# Altium PCB RobotCtrl_V2_Core-board.PcbDoc
Units mil, origin at the board's own origin, x right, y up, seen from the top; angles counter-clockwise.
Board outline 1880 x 1545 mil, 2 copper layers (Top Layer, Bottom Layer); 48 components, 127 nets, 368 pads, 173 vias.
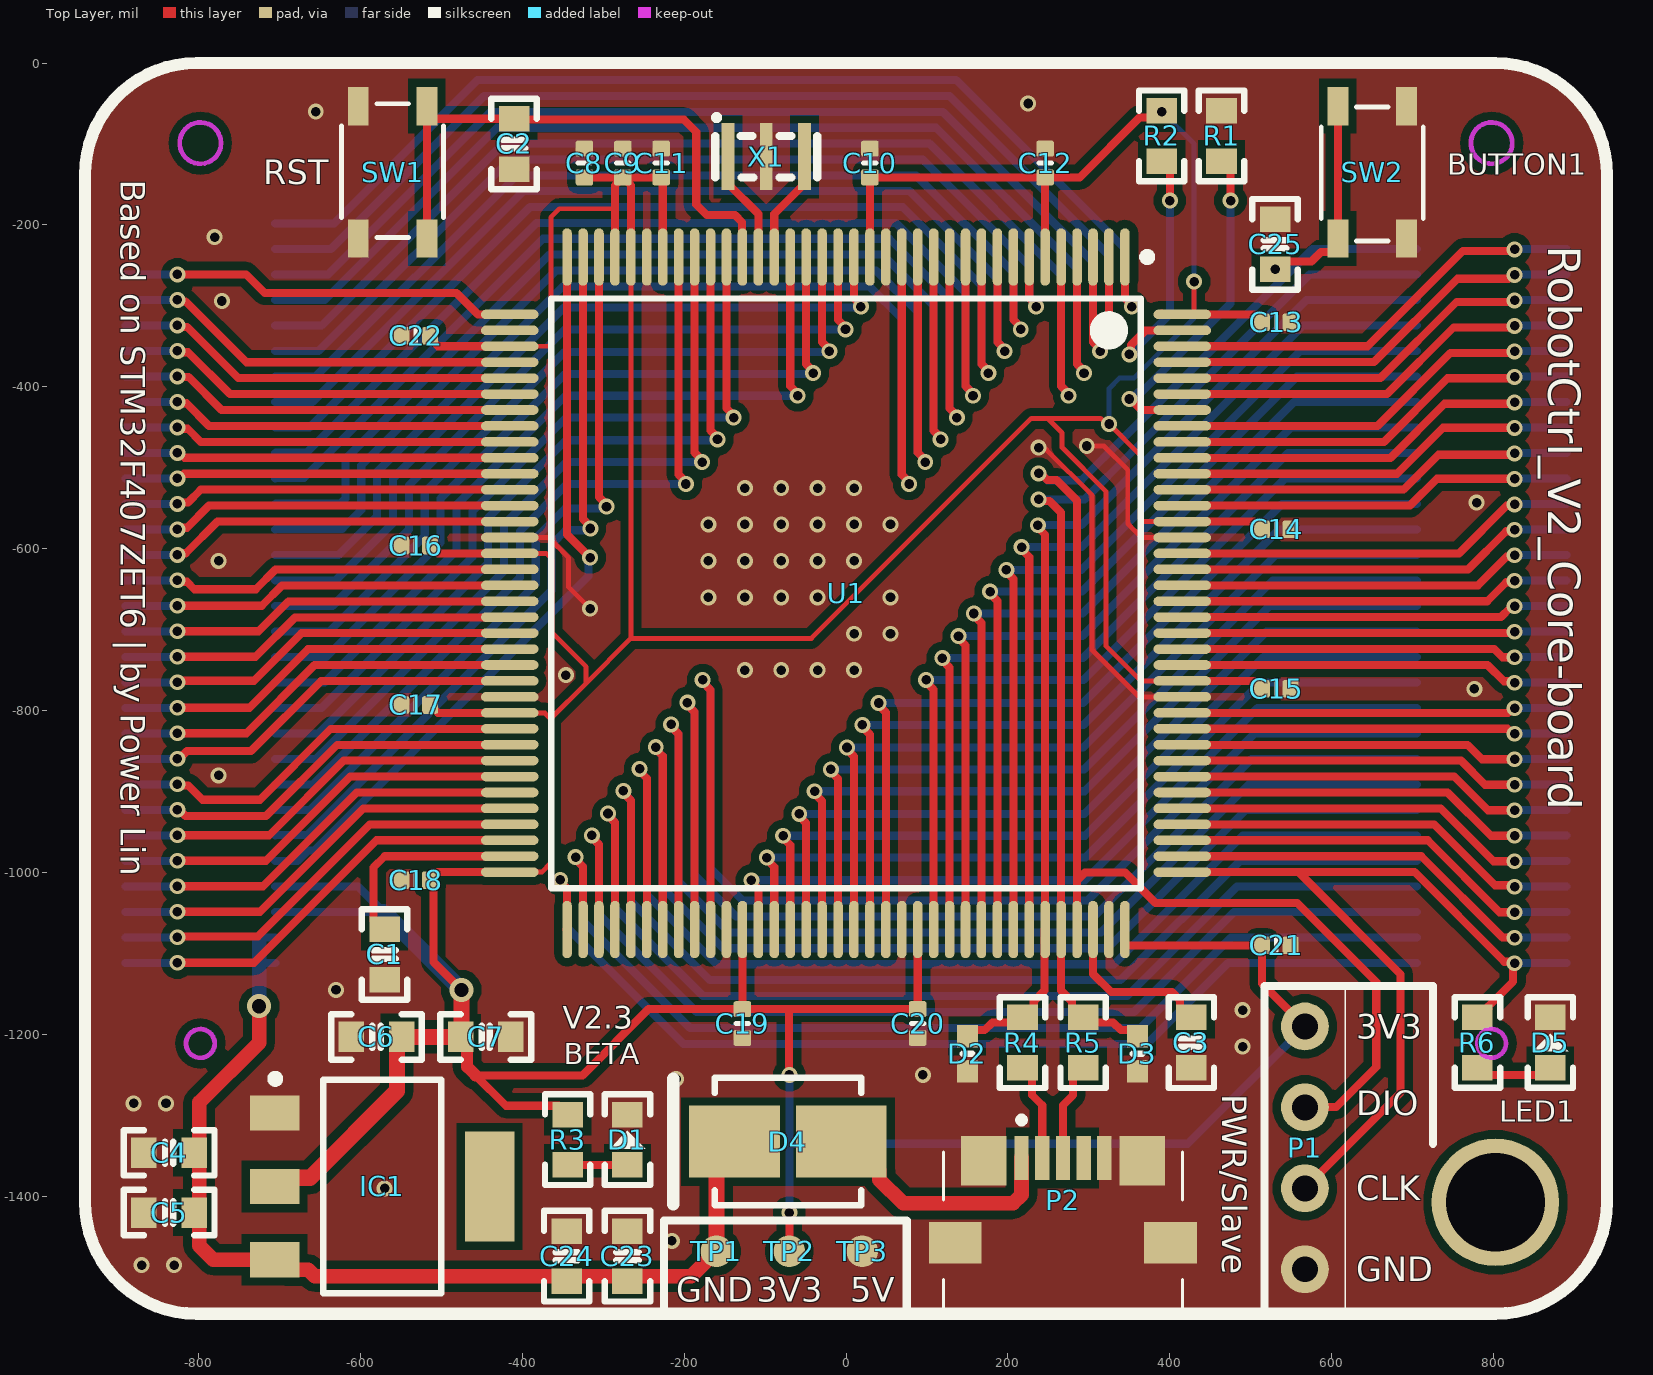
[diagram p0: Top Layer view]
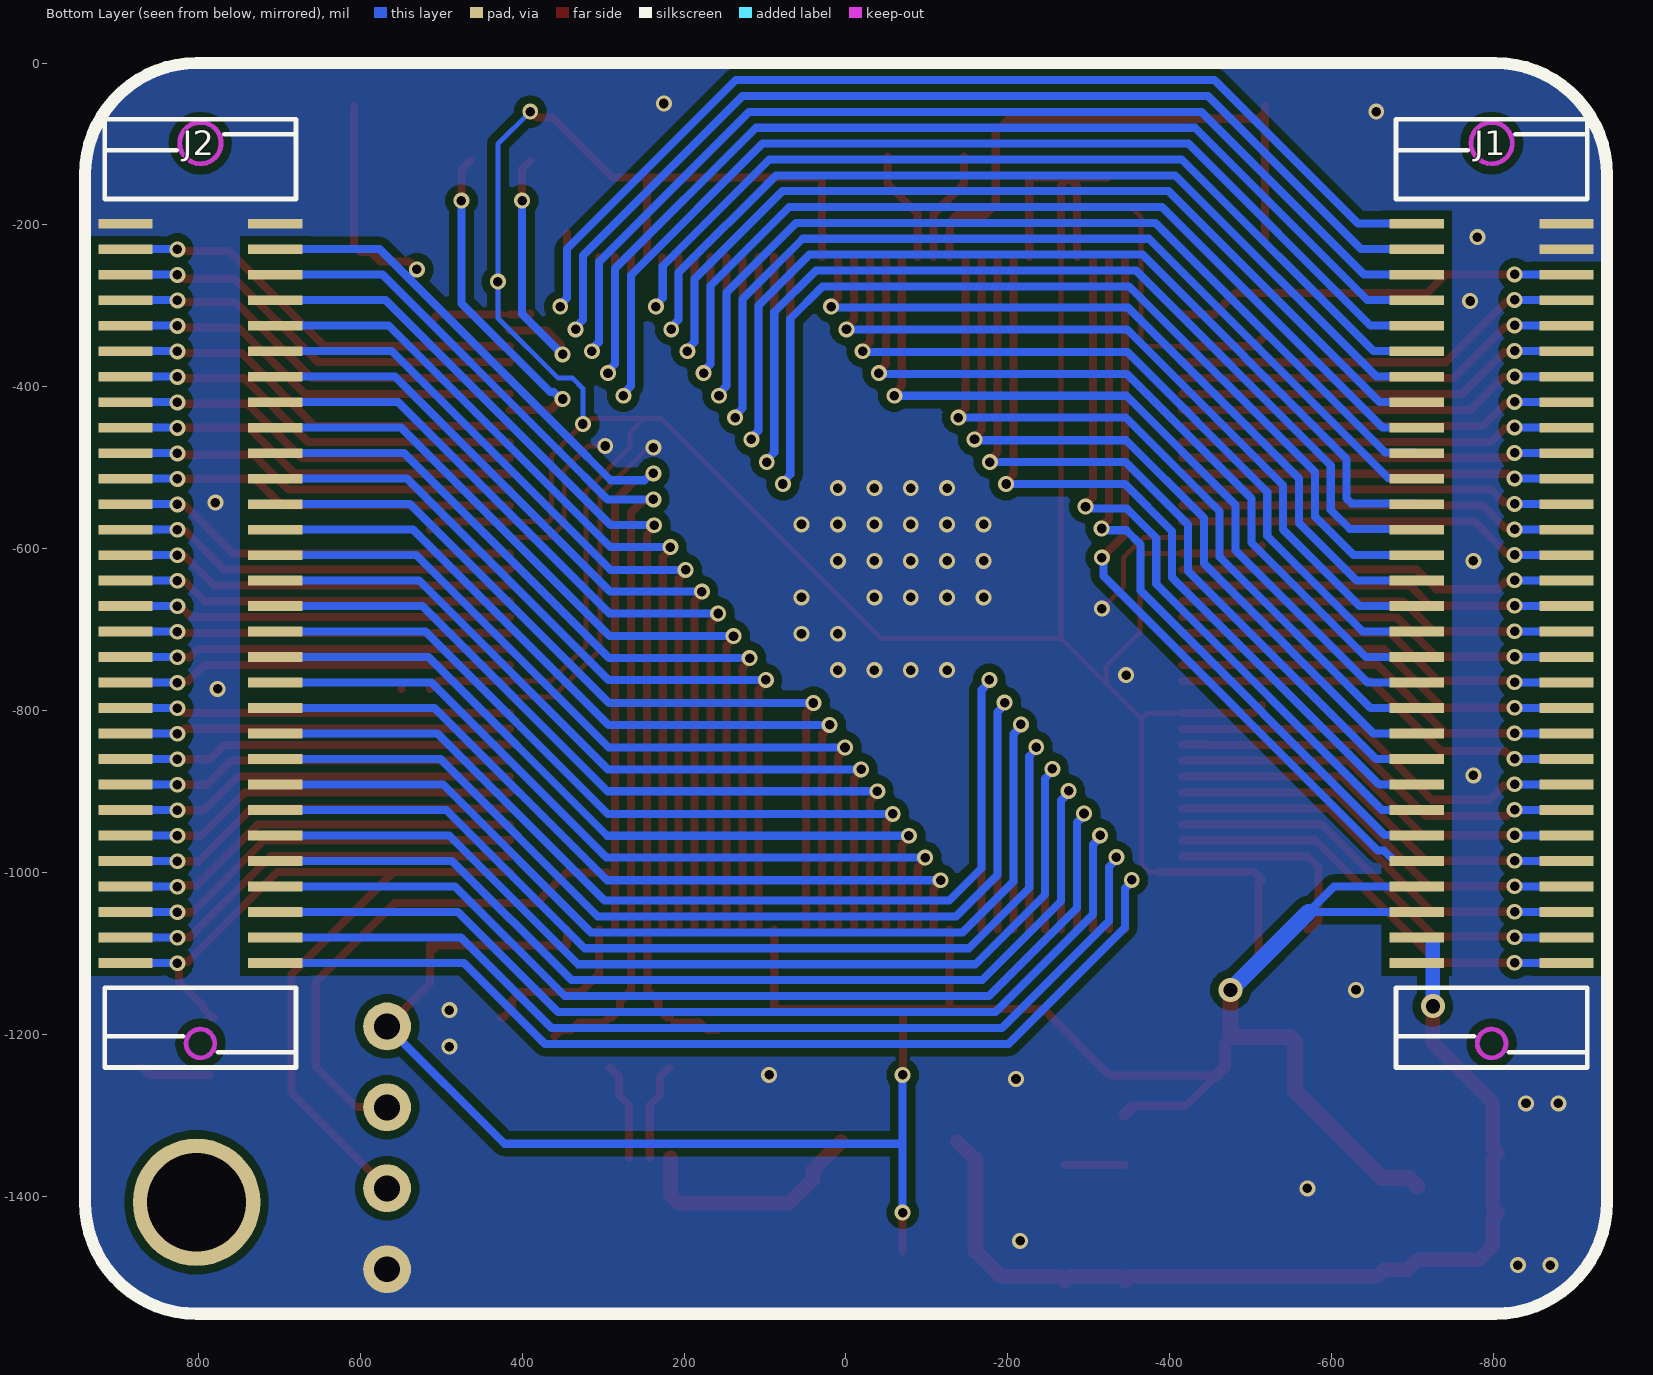
[diagram p1: Bottom Layer view, seen from below]
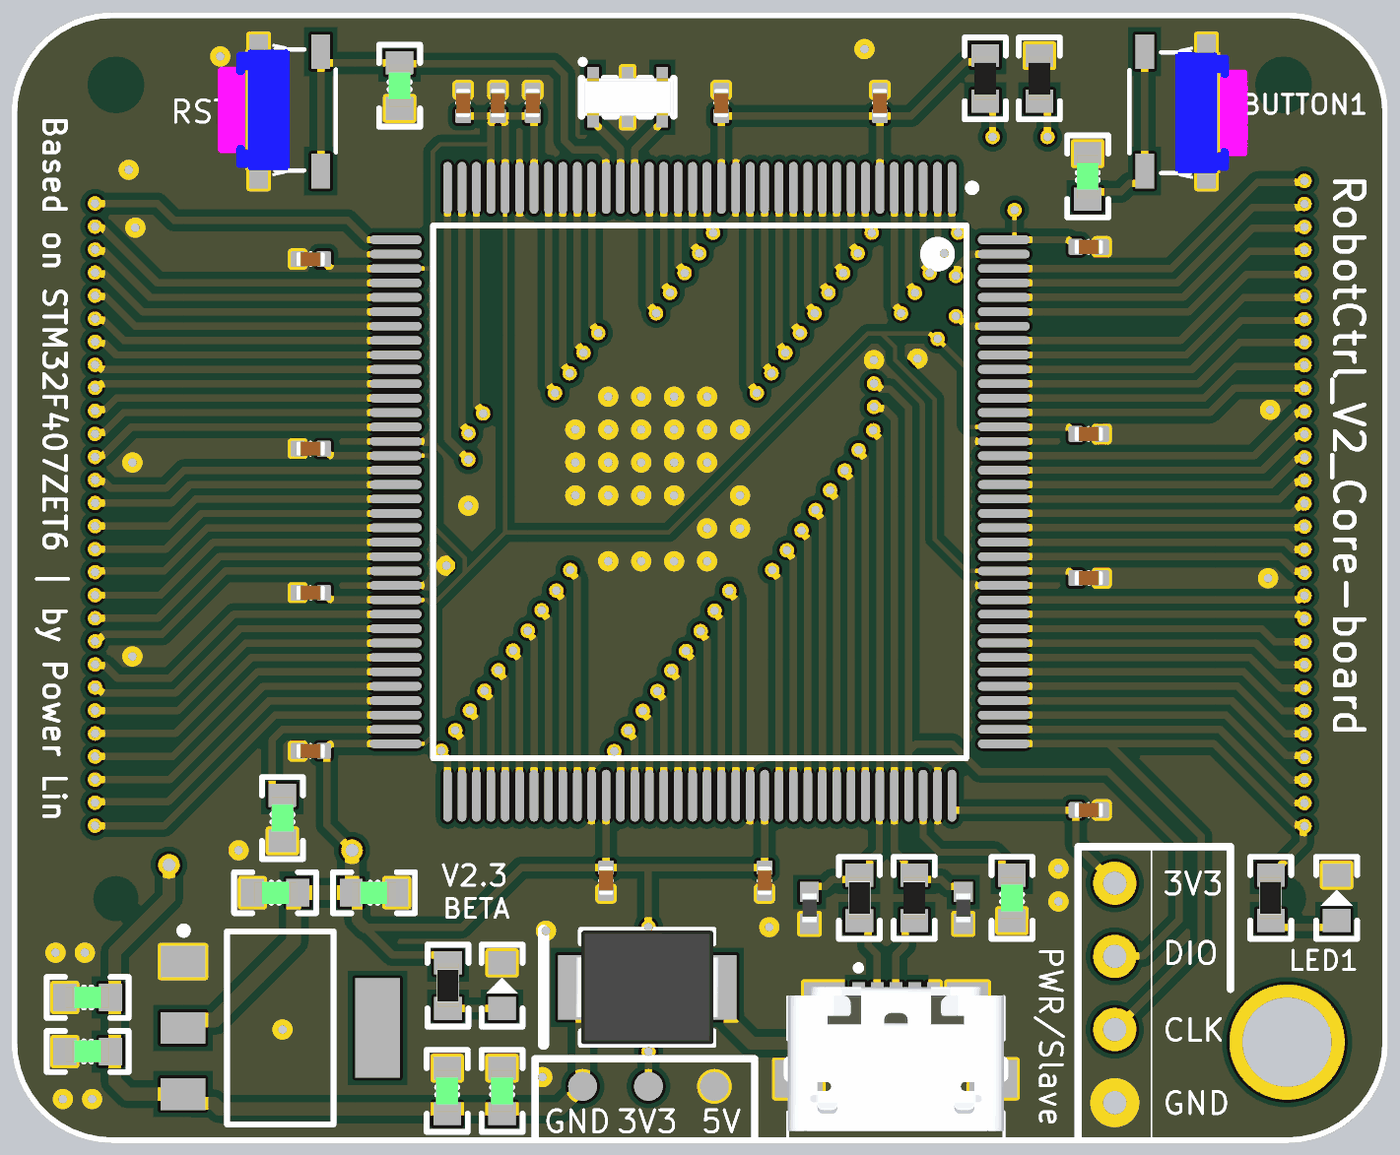
[diagram p2: 3D render of the assembled board from above, using the file's embedded part models]

## Layer stack, top to bottom
Top Solder: solder mask 0.4, Solder Resist, Dk 3.5
Top Layer: signal copper 1.4
Dielectric 1: dielectric 12.6, FR-4, Dk 4.8
Bottom Layer: signal copper 1.4
Bottom Solder: solder mask 0.4, Solder Resist, Dk 3.5

## Board outline
-802.2,-1545 cw(c-802.2,-1407.2) -940,-1407.2 -940,-137.8 cw(c-802.2,-137.8) -802.2,0 802.2,0 cw(c802.2,-137.8) 940,-137.8 940,-1407.2 cw(c802.2,-1407.2) 802.2,-1545

## Design rules (kind name [scope] priority, off if disabled: settings)
Clearance [All] p1: gap=10 ignorepadtopadclearanceinfootprint=FALSE except(0: Arc-Hole Track-Hole SMDPad-Hole THPad-Hole Via-Hole Fill-Hole Poly-Hole Region-Hole Text-Hole; 2: Arc-SMDPad Track-SMDPad SMDPad-SMDPad; 9.6: Arc-Arc Arc-Track Track-Track)
PlaneConnect [All] p1: planeconnectstyle=Direct reliefexpansion=20 reliefentries=4 reliefconductorwidth=10 reliefairgap=10
PolygonConnect [All] p1: connectstyle=Direct reliefconductorwidth=10 reliefentries=4 polygonreliefangle="90 Angle" airgapwidth=10
RoutingVias [All] p1: holewidth=11.81 width=19.68 viastyle="Through Hole" minholewidth=11.81 minwidth=19.68 maxholewidth=11.81 maxwidth=19.68
SolderMaskExpansion [All] p1: expansion=4 istentingtop=FALSE
Width [All] p1: maxlimit=100 minlimit=6 preferedwidth=10
29 further rules are at their usual default settings.

## Components (designator, comment, footprint, x,y, rotation, side; value= is the part's Value field where it differs from the comment)
C1 "2.2uF" CAP-0603 -570,-1101.1 r270 top
C2 "100nF" CAP-0603 -410,-100 r90 top
C3 "2.2uF" CAP-0603 426.55,-1210.1 r270 top
C4 "10uF" CAP-0603 -836.1,-1346.12 r0 top
C5 "100nF" CAP-0603 -836.1,-1420 r0 top
C6 "100nF" CAP-0603 -580,-1202.99 r0 top
C7 "10uF" CAP-0603 -445,-1202.99 r180 top
C8 "1uF" CAP-0402 -323.06,-123.54 r270 top
C9 "100nF" CAP-0402 -275.65,-123.54 r270 top
C10 "10uF" CAP-0402 29.53,-123.54 r270 top
C11 "100nF" CAP-0402 -228.23,-123.54 r270 top
C12 "100nF" CAP-0402 246.06,-123.54 r270 top
C13 "100nF" CAP-0402 531.46,-320.3 r180 top
C14 "100nF" CAP-0402 531.46,-576 r180 top
C15 "100nF" CAP-0402 531.46,-773 r180 top
C16 "100nF" CAP-0402 -531.46,-596 r0 top
C17 "100nF" CAP-0402 -531.46,-793 r0 top
C18 "100nF" CAP-0402 -531.46,-1009.28 r0 top
C19 "100nF" CAP-0402 -127.95,-1186.46 r90 top
C20 "100nF" CAP-0402 88.58,-1186.46 r90 top
C21 "100nF" CAP-0402 531.46,-1090 r180 top
C22 "100nF" CAP-0402 -531.46,-337 r0 top
C23 "10uF" CAP-0603 -270,-1473.9 r270 top
C24 "100nF" CAP-0603 -345,-1473.9 r270 top
C25 "100nF" CAP-0603 530,-223.9 r270 top
D1 "RED" LED-0603 -270,-1330 r90 top
D2 "PESD0402-140" D-0402 150,-1223.78 r90 top
D3 "PESD0402-140" D-0402 360,-1223.78 r90 top
D4 "S210" DO-214AA/SMB -71.73,-1332.29 r0 top
D5 "RED" LED-0603 870,-1210 r90 top
IC1 "AMS1117-3.3" SOT-223 -580,-1411.7 r270 top
J1 "3710M060037G3FT01" 3710M060037G3FT01 -704.96,-1111.69 r0 bottom locked
J2 "3710M060037G3FT01" 3710M060037G3FT01 890,-1111.69 r0 bottom locked
P1 "HDR1x4_2.54" HDR1X4_2.54 566.91,-1490 r180 top
P2 "MicroQTJ" USB-MICRO 268,-1430.25 r0 top
R1 "10k" R-0603 463.88,-90 r270 top
R2 "120R" R-0603 390,-90 r270 top
R3 "4.7k" R-0603 -343.88,-1330 r90 top
R4 "10R" R-0603 218,-1210.1 r270 top
R5 "10R" R-0603 293,-1210.1 r270 top
R6 "4.7k" R-0603 780,-1210 r90 top
SW1 "KEY" KEY-4P-4.2*3.4*2.5 -560,-135 r270 top
SW2 "KEY" KEY-4P-4.2*3.4*2.5 650,-135 r90 top
TP1 "TestPoint" TestPoint -160,-1467.71 r90 top
TP2 "TestPoint" TestPoint -70,-1467.71 r90 top
TP3 "TestPoint" TestPoint 20,-1467.71 r90 top
U1 "STM32F407ZET6" STM-LQFP144_N 0,-655 r270 top locked
X1 "8MHz" SMD3213-3P -98.5,-115.71 r0 top

## Footprints (in the part's own frame and the unit in brackets; to place one, negate y for a bottom-side part, rotate by r counter-clockwise, add the part's x,y. Pads: shape width x height; smd on the part's side, far side on the other; paste and mask are expansions set on the pad)
3710M060037G3FT01 [mm]
  rect 1.7x0.3 smd: 1(-4.7,0) 2(-4.7,-0.8) 3(-4.7,-1.6) 4(-4.7,-2.4) 5(-4.7,-3.2) 6(-4.7,-4) 7(-4.7,-4.8) 8(-4.7,-5.6) 9(-4.7,-6.4) 10(-4.7,-7.2) 11(-4.7,-8) 12(-4.7,-8.8) 13(-4.7,-9.6) 14(-4.7,-10.4) 15(-4.7,-11.2) 16(-4.7,-12) 17(-4.7,-12.8) 18(-4.7,-13.6) 19(-4.7,-14.4) 20(-4.7,-15.2) 21(-4.7,-16) 22(-4.7,-16.8) 23(-4.7,-17.6) 24(-4.7,-18.4) 25(-4.7,-19.2) 26(-4.7,-20) 27(-4.7,-20.8) 28(-4.7,-21.6) 29(-4.7,-22.4) 30(-4.7,-23.2) 31(0,-23.2) 32(0,-22.4) 33(0,-21.6) 34(0,-20.8) 35(0,-20) 36(0,-19.2) 37(0,-18.4) 38(0,-17.6) 39(0,-16.8) 40(0,-16) 41(0,-15.2) 42(0,-14.4) 43(0,-13.6) 44(0,-12.8) 45(0,-12) 46(0,-11.2) 47(0,-10.4) 48(0,-9.6) 49(0,-8.8) 50(0,-8) 51(0,-7.2) 52(0,-6.4) 53(0,-5.6) 54(0,-4.8) 55(0,-4) 56(0,-3.2) 57(0,-2.4) 58(0,-1.6) 59(0,-0.8) 60(0,0)
  Keep-Out Layer circle w0.152: c-2.35,2.525 r0.45
  Keep-Out Layer circle w0.152: c-2.35,-25.725 r0.65
  silkscreen extent -5.35,-26.47 0.65,3.27
CAP-0402 [mm]
  rrect25% 0.5x0.55 smd: 1(-0.45,0) 2(0.45,0)
  silkscreen extent 0,-0.2 0,0.2, body extent -0.5,-0.25 0.5,0.25, height 0.6
CAP-0603 [mm]
  rect 0.8x0.96 smd: 1(-0.79,0) 2(0.79,0)
  silkscreen extent -1.42,-0.71 1.42,0.71, body extent -0.76,-0.39 0.76,0.39, height 0.9
D-0402 [mm]
  rect 0.7x0.65 smd: 1(-0.55,0) 2(0.55,0)
  silkscreen extent 0,-0.15 0,0.15, body extent -0.5,-0.25 0.5,0.25, height 0.43
DO-214AA/SMB [mm]
  rect 2.85x2.25 smd: 1(1.675,0) 2(-1.675,0)
  silkscreen extent -3.6,-2 2.3,2, body extent -2.5,-1.97 2.5,1.97, height 2.44
HDR1X4_2.54 [mm]
  round 1.5 hole 0.813: 1(0,0) 2(0,-2.54) 3(0,-5.08) 4(0,-7.62)
  silkscreen extent -1.27,-8.89 1.27,1.27
KEY-4P-4.2*3.4*2.5 [mm] "SKRPABE010"
  rect 1.2x0.65 smd: 1(-2.075,1.075) 1(2.075,1.075) 2(-2.075,-1.075) 2(2.075,-1.075)
  silkscreen extent -2.15,-1.6 2.05,1.6, body extent -2.35,-1.6 2.25,1.6, height 2.5
LED-0603 [mm]
  rect 0.8x0.96 smd: 1(-0.79,0) 2(0.79,0)
  silkscreen extent -1.42,-0.71 1.42,0.71, body extent -0.81,-0.4 0.81,0.4, height 0.6
R-0603 [mm]
  rect 0.8x0.96 smd: 1(-0.79,0) 2(0.79,0)
  silkscreen extent -1.42,-0.71 1.42,0.71, body extent -0.76,-0.38 0.76,0.38, height 0.41
SMD3213-3P [mm]
  rect 0.4x2.1 smd: 1(-1.2,0) 2(0,0) 3(1.2,0)
  silkscreen extent -1.6,-0.65 1.6,1.27, body extent -1.6,-0.65 1.6,0.65, height 0.7
SOT-223 [mm]
  rect 1.1x1.55 smd: 1(-2.91,-3.197) 2(-0.61,-3.197) 3(1.69,-3.197)
  rect 3.45x1.55 smd: 4(-0.61,3.553)
  silkscreen extent -4.11,-3.3 2.74,2.03, body extent -3.88,-3.38 2.62,3.58, height 1.7
STM-LQFP144_N [mm] "Thin QFP, 144-Leads, Body 20x20mm, Pitch 0.5mm, IPC Medium Density"
  oval 1.8x0.3 smd: 1(-10.55,8.75) 2(-10.55,8.25) 3(-10.55,7.75) 4(-10.55,7.25) 5(-10.55,6.75) 6(-10.55,6.25) 7(-10.55,5.75) 8(-10.55,5.25) 9(-10.55,4.75) 10(-10.55,4.25) 11(-10.55,3.75) 12(-10.55,3.25) 13(-10.55,2.75) 14(-10.55,2.25) 15(-10.55,1.75) 16(-10.55,1.25) 17(-10.55,0.75) 18(-10.55,0.25) 19(-10.55,-0.25) 20(-10.55,-0.75) 21(-10.55,-1.25) 22(-10.55,-1.75) 23(-10.55,-2.25) 24(-10.55,-2.75) 25(-10.55,-3.25) 26(-10.55,-3.75) 27(-10.55,-4.25) 28(-10.55,-4.75) 29(-10.55,-5.25) 30(-10.55,-5.75) 31(-10.55,-6.25) 32(-10.55,-6.75) 33(-10.55,-7.25) 34(-10.55,-7.75) 35(-10.55,-8.25) 36(-10.55,-8.75) 73(10.55,-8.75) 74(10.55,-8.25) 75(10.55,-7.75) 76(10.55,-7.25) 77(10.55,-6.75) 78(10.55,-6.25) 79(10.55,-5.75) 80(10.55,-5.25) 81(10.55,-4.75) 82(10.55,-4.25) 83(10.55,-3.75) 84(10.55,-3.25) 85(10.55,-2.75) 86(10.55,-2.25) 87(10.55,-1.75) 88(10.55,-1.25) 89(10.55,-0.75) 90(10.55,-0.25) 91(10.55,0.25) 92(10.55,0.75) 93(10.55,1.25) 94(10.55,1.75) 95(10.55,2.25) 96(10.55,2.75) 97(10.55,3.25) 98(10.55,3.75) 99(10.55,4.25) 100(10.55,4.75) 101(10.55,5.25) 102(10.55,5.75) 103(10.55,6.25) 104(10.55,6.75) 105(10.55,7.25) 106(10.55,7.75) 107(10.55,8.25) 108(10.55,8.75)
  oval 0.3x1.8 smd: 37(-8.75,-10.55) 38(-8.25,-10.55) 39(-7.75,-10.55) 40(-7.25,-10.55) 41(-6.75,-10.55) 42(-6.25,-10.55) 43(-5.75,-10.55) 44(-5.25,-10.55) 45(-4.75,-10.55) 46(-4.25,-10.55) 47(-3.75,-10.55) 48(-3.25,-10.55) 49(-2.75,-10.55) 50(-2.25,-10.55) 51(-1.75,-10.55) 52(-1.25,-10.55) 53(-0.75,-10.55) 54(-0.25,-10.55) 55(0.25,-10.55) 56(0.75,-10.55) 57(1.25,-10.55) 58(1.75,-10.55) 59(2.25,-10.55) 60(2.75,-10.55) 61(3.25,-10.55) 62(3.75,-10.55) 63(4.25,-10.55) 64(4.75,-10.55) 65(5.25,-10.55) 66(5.75,-10.55) 67(6.25,-10.55) 68(6.75,-10.55) 69(7.25,-10.55) 70(7.75,-10.55) 71(8.25,-10.55) 72(8.75,-10.55) 109(8.75,10.55) 110(8.25,10.55) 111(7.75,10.55) 112(7.25,10.55) 113(6.75,10.55) 114(6.25,10.55) 115(5.75,10.55) 116(5.25,10.55) 117(4.75,10.55) 118(4.25,10.55) 119(3.75,10.55) 120(3.25,10.55) 121(2.75,10.55) 122(2.25,10.55) 123(1.75,10.55) 124(1.25,10.55) 125(0.75,10.55) 126(0.25,10.55) 127(-0.25,10.55) 128(-0.75,10.55) 129(-1.25,10.55) 130(-1.75,10.55) 131(-2.25,10.55) 132(-2.75,10.55) 133(-3.25,10.55) 134(-3.75,10.55) 135(-4.25,10.55) 136(-4.75,10.55) 137(-5.25,10.55) 138(-5.75,10.55) 139(-6.25,10.55) 140(-6.75,10.55) 141(-7.25,10.55) 142(-7.75,10.55) 143(-8.25,10.55) 144(-8.75,10.55)
  silkscreen extent -10.67,-9.25 9.25,9.58, body extent -10,-10 10,10, height 1.6
TestPoint [mm]
  round 1 smd: 1(0,0)
USB-MICRO [mm]
  rect 0.45x1.38 smd: 1(-1.3,1.975) 2(-0.65,1.975) 3(0,1.975) 4(0.65,1.975) 5(1.3,1.975)
  rect 1.65x1.3 smd: EH(-3.375,-0.685) EH(3.375,-0.685)
  rect 1.425x1.55 smd: EH(-2.487,1.89) EH(2.487,1.89)
  silkscreen extent -3.75,-2.84 3.75,3.26, body extent -3.9,-2.5 3.9,2.5, height 2.72

## Part data
C1 C2 C3 C4 C5 C6 C7 C8 C9 C10 C11 C12 C13 C14 C15 C16 C17 C18 C19 C20 C21 C22 C23 C24 C25: library part CAP, "贴片电容", Package=0402, SuppliersPartNumber=C52923, ComponentLink1Description=供应商链接, ComponentLink1URL=http://www.szlcsc.com/product/details_53938.html, Supplier=LC
D1 D5: library part LED, "发光二极管", Package=0603, SuppliersPartNumber=C2290, ComponentLink1Description=供应商链接, ComponentLink1URL=http://www.szlcsc.com/product/details_2663.html, Supplier=LC
D2 D3: library part TVS_C
D4: library part DIODE, "二极管", Package=SMA(DO-214AC), SuppliersPartNumber=C22452, ComponentLink1Description=供应商链接, ComponentLink1URL=http://www.szlcsc.com/product/details_23178.html, Supplier=LC
IC1: library part AMS1117, "AMS1117-3.3 1.0A", Manufacturer_Name=Nexperia, Manufacturer_Part_Number=SI2302DS, Mouser Part Number=N/A, RS Part Number=7983053P, Datasheet Link=https://assets.nexperia.com/documents/data-sheet/SI2302DS.pdf, Height=1.1mm, Mouser Price/Stock=https://www.mouser.com/Search/Refine.aspx?Keyword=N%2FA, RS Price/Stock=http://uk.rs-online.com/web/p/products/7983053P
J1 J2: library part 3710M/F, "B2B Connector"
P1: "Header"
P2: library part USB_MICRO, "USB_MICRO"
R1 R2 R3 R4 R5 R6: library part RES, "贴片电阻", Package=0805, SuppliersPartNumber=C17798, Supplier=LC
SW1 SW2: "按键开关"
TP1 TP2 TP3: "测试点"
U1: "ARM Cortex-M4 32-bit MCU+FPU, 210 DMIPS, 512 kB Flash, 192 kB Internal RAM, 114 I/Os, 144-pin LQFP, -40 to 85 degC, Tray", I/Os (High Current)=114, Manufacturer=STMicroelectronics, Operating Frequency(F) (Processor speed) (MHz)=168, Supplier Part Number 1=497-11903-ND, Supply Voltage(Vcc) max (V)=3.6, Supply Voltage(Vcc) min (V)=1.8, ComponentLink1Description="Manufacturer URL", ComponentLink1URL=http://www.st.com/web/en/home.html, ComponentLink2Description=Datasheet, ComponentLink2URL=http://www.st.com/st-web-ui/static/active/en/resource/technical/document/datasheet/DM00037051.pdf, ComponentLink3Description="Package Specification", ComponentLink3URL=http://www.st.com/st-web-ui/static/active/en/resource/technical/document/datasheet/DM00037051.pdf, Core="ARM Cortex-M4", D/A Converter=2x12-bit, DatasheetVersion="Rev. 4", FLASH Size (Prog) (kB)=512, Internal RAM Size (kB)=192, Mounting Technology="Surface Mount", PackageDescription="144-Pin Low Profile Quad Flat Package, 20 x 20 mm Body, 0.5 mm Pitch", PackageReference=LQFP144, PackageVersion="Rev. 4, 06/2013", Packing=Tray, PartNumber=STM32F407ZET6, Supplier 1=Digi-Key, Supplier 2=Farnell, Supplier 3=Newark, Supplier 4=Newark, Supplier 5=Mouser, Supplier Part Number 2=2215229, Supplier Part Number 3=46W2203, Supplier Part Number 4=87T3795, Supplier Part Number 5=511-STM32F407ZET6
X1: library part XTAL, "CSTCE8M00G15C99-R0"

## Free pads (board coordinates)
  round 157.48 hole 122.05: 2(802.2,-1407.2)

## Via types
v1: diameter 19.68, hole 11.81, Top Layer to Bottom Layer, 171 vias
v2: diameter 29.53, hole 17.72, Top Layer to Bottom Layer, 2 vias

## Nets (pads, with @x,y where several pads share a name; then routed paths per layer and width w, separated by ;. In a path a pad name is that pad's centre, name@x,y a point inside that pad or via, vN(x,y) a via of type N, cw(c..) or ccw(c..) an arc to the next point about the centre after c; other vN are vias at no path point)
GND: C1.2 C2.1 C3.2 C4.1 C5.1 C6.1 C7.1 C8.1 C9.1 C10.1 C11.1 C12.1 C13.1 C14.1 C15.1 C16.1 C17.1 C18.1 C19.1 C20.1 C21.1 C22.1 C23.1 C24.1 C25.1 D1.2 D2.1 D3.1 D5.2 IC1.1 J1.29 J1.30 J2.30 J2.31 P1.1 P2.5 P2.EH R1.1 SW1.2 SW2.2 TP3.1 U1.16 U1.31 U1.38 U1.51 U1.61 U1.83 U1.94 U1.107 U1.120 U1.130 X1.2 | length 777.6
  Top Layer w6: U1.51 -367.84,-586.1 -342.67,-611.27 -342.67,-647.33 v1(-316,-674) ; v1(238,-475) 240.62,-477.62 247.51,-477.62 304,-534.11 304,-725.06 361.89,-782.95 U1.120 ; v1(297.36,-473.05) 318.54,-473.05 348,-502.51 348,-568.96 365.14,-586.1 U1.130
  Top Layer w10: C15.1 C15.1@549.25,-773.08 ; v1@776.22,-773.08 v1(776.3,-773.16)
  other v1: -870,-1485 -830,-1485 -215,-1455 -570,-1390 -880,-1285 -840,-1285 -210,-1255 95,-1250 490,-1215 490,-1170 -630,-1145 -775,-880 -346,-756 -125,-750 -80,-750 -35,-750 10,-750 10,-705 55,-705 -170,-660 -125,-660 -80,-660 -35,-660 55,-660 -775,-615 -170,-615 -125,-615 -80,-615 -35,-615 10,-615 -170,-570 -125,-570 -80,-570 -35,-570 10,-570 55,-570 779,-543 -125,-525 -80,-525 -35,-525 10,-525 -771,-294 -780,-215 -655,-60 225,-50
NetC1_1: C1.1 U1.71 | length 258.1
  Top Layer w10: C1.1 -573.15,-1070 -583.9,-1059.25 -583.9,-993.9 -569.8,-979.8 U1.71
NetC2_2: C2.2 SW1.1 U1.25 | length 704.6
  Top Layer w10: SW1.1@-517.68,-216.69 SW1.1@-517.68,-61.1 ; SW1.1@-517.68,-53.31 SW1.1@-517.68,-61.1 ; U1.25 -127.95,-209.63 -128.3,-209.28 -128.3,-196.7 -137.29,-187.71 -172,-187.71 -185,-174.71 -185,-85 -200,-70 -408.9,-70 C2.2 -509.88,-68.9 SW1.1@-517.68,-61.1
NetC3_1: C3.1 U1.106 | length 204.7
  Top Layer w10: U1.106 305.12,-1125.12 327.66,-1147.66 402.66,-1147.66 412.66,-1157.66 412.66,-1168.25 423.4,-1179 C3.1
NetD1_A: D1.1 R3.1 | length 73.9
  Top Layer w10: R3.1 D1.1
NetD4_1: D4.1 P2.1 | length 299.4
  Top Layer w18: D4.1@6.02,-1332.29 41.31,-1367.58 41.31,-1379.4 70.63,-1408.71 206.27,-1408.71 216.82,-1398.17 P2.1
NetD5_A: D5.1 R6.1 | length 87.4
  Top Layer w10: R6.1@786.27,-1250 861.1,-1250 D5.1
NetP2_2: P2.2 R4.2 | length 122.1
  Top Layer w10: R4.2 219.25,-1241.2 230,-1251.95 230,-1275 242.41,-1287.41 P2.2
NetP2_3: P2.3 R5.2 | length 122.1
  Top Layer w10: P2.3 268,-1287.41 280.41,-1275 280.41,-1251.95 291.16,-1241.2 R5.2@292.41,-1241.2
NetR1_2: R1.2 U1.138 | length 425.5
  Top Layer w10: v1(350,-415) 351.3,-415 364.92,-428.62 U1.138 ; R1.2 464.25,-121.1 475,-131.85 v1(475,-170)
  Bottom Layer w10: v1(350,-415) 352.62,-415 361.02,-406.6 365.29,-406.6 475,-296.89 v1(475,-170)
NetR2_2: R2.2 U1.143 | length 347.3
  Top Layer w10: v1(350,-360) 351.85,-358.15 351.85,-348.15 369.8,-330.2 U1.143 ; R2.2 400,-131.1 v1(400,-170)
  Bottom Layer w10: v1(350,-360) 400,-310 v1(400,-170)
NetU1_23: U1.23 X1.3 | length 139.5
  Top Layer w10: U1.23 -88.58,-186.65 -51.11,-149.18 X1.3@-51.11,-115.71
NetU1_24: U1.24 X1.1 | length 139.5
  Top Layer w10: X1.1 -145.74,-149.18 -108.27,-186.65 U1.24
PA0: J1.54 U1.34 | length 910
  Top Layer w10: U1.34 -305.12,-536.11 -295.85,-545.38 v1(-295.85,-548)
  Bottom Layer w10: J1.54 -662.28,-922.72 -383.2,-643.64 -383.2,-586.5 -346.86,-550.16 -304.86,-550.16 -304.55,-549.85 -297.7,-549.85 v1(-295.85,-548)
PA1: J1.55 U1.35 | length 918.3
  Top Layer w10: U1.35 -324.8,-563.43 -315.85,-572.38 v1(-315.85,-575)
  Bottom Layer w10: J1.55 -704.12,-953.37 -665.22,-953.37 -363.6,-651.76 -363.6,-594.62 -346.14,-577.16 -324.86,-577.16 -324.55,-576.85 -317.7,-576.85 v1@-316.15,-575.3
PA2: J1.56 U1.36 | length 939.6
  Top Layer w10: U1.36 -344.49,-582.51 v1(-316,-611)
  Bottom Layer w10: J1.56 -677.4,-985.71 -664.67,-972.97 -657.1,-972.97 -317.85,-633.73 -317.85,-612.85 v1(-316,-611)
PA3: J1.28 U1.37 | length 494.9
  Top Layer w10: v1(-826,-260.99) -741,-260.99 -717.99,-284 -481,-284 -454.49,-310.51 U1.37
  Bottom Layer w10: J1.28 v1@-826.31,-261.3
PA4: J1.27 U1.40 | length 506.3
  Top Layer w10: v1(-826,-292.49) -824.15,-294.34 -815.66,-294.34 -740.43,-369.57 U1.40
  Bottom Layer w10: J1.27 v1@-826.31,-292.8
PA5: J1.26 U1.41 | length 501.4
  Top Layer w10: v1(-826,-323.98) -824.15,-325.84 -814.16,-325.84 -750.75,-389.25 U1.41
  Bottom Layer w10: J1.26 v1@-826.31,-324.29
PA6: J1.25 U1.42 | length 496.5
  Top Layer w10: v1(-826,-355.48) -824.17,-357.31 -812.69,-357.31 -761.06,-408.94 U1.42
  Bottom Layer w10: J1.25 v1@-826.31,-355.79
PA7: J1.24 U1.43 | length 491.6
  Top Layer w10: v1(-826,-386.98) -824.92,-388.05 -811.95,-388.05 -771.38,-428.62 U1.43
  Bottom Layer w10: J1.24 v1@-826.31,-387.28
PA8: J2.24 U1.100 | length 1058.1
  Top Layer w10: v1(178,-653) 178,-655.62 187.01,-664.63 U1.100
  Bottom Layer w10: v1(178,-653) 291.59,-653 557.31,-387.28 J2.24
PA9: J2.25 U1.101 | length 1066.8
  Top Layer w10: v1(198,-626) 198,-628.62 206.69,-637.31 U1.101
  Bottom Layer w10: v1(198,-626) 290.87,-626 561.09,-355.79 J2.25
PA10: J2.26 U1.102 | length 1077.6
  Top Layer w10: v1(217,-598) 217,-600.62 226.38,-610 U1.102
  Bottom Layer w10: v1(217,-598) 291.15,-598 564.86,-324.29 J2.26
PA11: D2.2 J2.27 R4.1 U1.103 | length 1266.2
  Top Layer w10: D2.2@158.46,-1194.67 171.33,-1194.67 181,-1185 R4.1@212,-1185 ; R4.1 221.15,-1179 231.9,-1168.25 231.9,-1159.1 245.25,-1145.75 U1.103@245.25,-1070.35 ; v1(237,-571) 237,-573.62 246.06,-582.68 U1.103 246.06,-1070.87 U1.103@246.11,-1070.82
  Bottom Layer w10: v1(237,-571) 237.3,-570.7 290.74,-570.7 568.64,-292.8 J2.27
PA12: D3.2 J2.28 R5.1 U1.104 | length 1329.9
  Top Layer w10: v1(238,-539) 239.85,-540.85 251.23,-540.85 265.75,-555.37 U1.104 265.75,-1145.75 279.1,-1159.1 279.1,-1168.25 289.85,-1179 R5.1 299,-1185 330,-1185 339.67,-1194.67 352.54,-1194.67 D3.2
  Bottom Layer w10: v1(238,-539) 294.72,-539 353.52,-480.2 572.42,-261.3 J2.28
PA13: C25.2 J2.29 P1.3 SW2.1 U1.105 | length 2100.2
  Top Layer w10: v1(238,-507) 240.62,-507 247.78,-514.16 247.86,-514.16 248.7,-515 260,-515 285.43,-540.43 285.43,-1009.57 ; U1.105 285.43,-1009.57 ; v1(530,-255) 540,-245 575,-245 586.68,-233.32 599.88,-233.32 607.68,-225.53 607.68,-216.69 SW2.1@607.68,-53.31 ; P1.3 567.49,-1289.42 605.58,-1289.42 655,-1240 655,-1135 557.42,-1037.42 382.42,-1037.42 345,-1000 295,-1000 285.43,-1009.57
  Bottom Layer w10: v1(238,-507) 240.27,-507 248.7,-515.43 290.57,-515.43 345.4,-460.6 540.5,-265.5 ; v1(530,-255) 540.5,-265.5 ; J2.29 576.2,-229.8 540.5,-265.5
PA14: J2.60 P1.2 R6.2 U1.109 | length 1100.4
  Top Layer w10: U1.109 558.92,-999.49 ; P1.2 685,-1271.91 685,-1125.57 558.92,-999.49 ; R6.2 783.15,-1178.9 793.9,-1168.15 793.9,-1165 824.15,-1134.75 824.15,-1113.85 v1(826,-1112) 824.15,-1110.15 813.15,-1110.15 702.49,-999.49 558.92,-999.49
  Bottom Layer w10: v1@826.31,-1111.69 J2.60
PA15: J2.59 U1.110 | length 516.1
  Top Layer w10: U1.110 415.44,-979.89 710.61,-979.89 811.04,-1080.33 825.82,-1080.33 v1(826,-1080.5)
  Bottom Layer w10: v1@826.31,-1080.2 J2.59
PB0: J1.21 U1.46 | length 476.9
  Top Layer w10: v1(-826,-481.46) -823.38,-481.46 -817.25,-487.59 -415.44,-487.59 U1.46
  Bottom Layer w10: J1.21 v1@-826.31,-481.77
PB1: J1.20 U1.47 | length 476.1
  Top Layer w10: v1@-825.59,-512.55 -822.97,-512.55 -817.78,-507.36 U1.47
  Bottom Layer w10: J1.20 v1@-826.31,-513.27
  other v1: -826,-512.96
PB2: J1.19 U1.48 | length 481.5
  Top Layer w10: v1(-826,-544.46) -824.21,-542.66 -812.66,-542.66 -797.05,-527.05 U1.48
  Bottom Layer w10: J1.19 v1@-826.31,-544.76
PB3: J2.40 U1.133 | length 493
  Top Layer w10: U1.133 688.7,-527.05 731.82,-483.93 824.15,-483.93 v1(826,-482.08)
  Bottom Layer w10: v1@826.31,-481.77 J2.40
PB4: J2.39 U1.134 | length 497.9
  Top Layer w10: U1.134 680.67,-507.36 737.45,-450.58 v1(826,-450.58)
  Bottom Layer w10: v1@826.31,-450.28 J2.39
PB5: J2.38 U1.135 | length 502.7
  Top Layer w10: U1.135 672.63,-487.68 739.37,-420.94 824.15,-420.94 v1(826,-419.09)
  Bottom Layer w10: v1@826.31,-418.78 J2.38
PB6: J2.37 U1.136 | length 507.6
  Top Layer w10: U1.136 664.6,-467.99 743.15,-389.44 824.15,-389.44 v1(826,-387.59)
  Bottom Layer w10: v1@826.31,-387.28 J2.37
PB7: J2.36 U1.137 | length 512.5
  Top Layer w10: U1.137 656.57,-448.31 746.93,-357.95 824.15,-357.95 v1(826,-356.09)
  Bottom Layer w10: v1@826.31,-355.79 J2.36
PB8: J2.35 U1.139 | length 509.3
  Top Layer w10: U1.139 U1.139 668.3,-408.85 750.7,-326.45 824.15,-326.45 v1(826,-324.6)
  Bottom Layer w10: v1@826.31,-324.29 J2.35
PB9: J2.34 U1.140 | length 514.2
  Top Layer w10: U1.140 445.55,-389.25 445.72,-389.08 660.36,-389.08 754.48,-294.96 824.15,-294.96 v1(826,-293.1)
  Bottom Layer w10: v1@826.31,-292.8 J2.34
PB10: J1.2 U1.69 | length 532.1
  Top Layer w10: v1(-826,-1079.89) -824.96,-1078.85 -726.56,-1078.85 -588.24,-940.52 -415.44,-940.52 U1.69
  Bottom Layer w10: J1.2 v1@-826.31,-1080.2
PB11: J1.1 U1.70 | length 537
  Top Layer w10: v1(-826,-1111.39) -731.39,-1111.39 -580.12,-960.12 U1.70
  Bottom Layer w10: J1.1 v1@-826.31,-1111.69
PB12: J2.1 U1.73 | length 1278
  Top Layer w10: v1(-353,-1009) -353,-1011.19 -344.49,-1019.7 -344.49,-1069.84 U1.73@-345,-1070.35
  Bottom Layer w10: v1(-353,-1009) -353,-1011.19 -344.49,-1019.7 -344.49,-1068.06 -200.91,-1211.64 371.91,-1211.64 471.86,-1111.69 J2.1
PB13: J2.2 U1.74 | length 1306.6
  Top Layer w10: v1(-334,-981) -334,-983.62 -324.8,-992.82 U1.74
  Bottom Layer w10: v1(-334,-981) -334,-983.62 -324.8,-992.82 -324.8,-1059.91 -192.76,-1191.95 363.76,-1191.95 475.51,-1080.2 J2.2
PB14: J2.3 U1.75 | length 1332.6
  Top Layer w10: v1(-314,-954) -314,-956.62 -305.12,-965.5 U1.75
  Bottom Layer w10: v1(-314,-954) -314,-956.62 -305.12,-965.5 -305.12,-1051.75 -184.61,-1172.26 355.61,-1172.26 479.17,-1048.7 J2.3
PB15: J2.4 U1.76 | length 1358.7
  Top Layer w10: v1(-294,-927) -294,-929.62 -285.43,-938.19 U1.76
  Bottom Layer w10: v1(-294,-927) -294,-929.62 -285.43,-938.19 -285.43,-1043.6 -176.45,-1152.58 347.45,-1152.58 482.83,-1017.2 J2.4
PC0: J1.50 U1.26 | length 949.9
  Top Layer w10: U1.26 -147.64,-426.44 -138.7,-435.38 v1(-138.7,-438)
  Bottom Layer w10: J1.50 -648.01,-796.73 -461.6,-610.32 -461.6,-554.03 -345.57,-438 v1(-138.7,-438)
PC1: J1.51 U1.27 | length 959.2
  Top Layer w10: U1.27 -167.32,-453.76 -158.7,-462.38 v1(-158.7,-465)
  Bottom Layer w10: J1.51 -651.79,-828.23 -442,-618.44 -442,-562.14 -345.86,-466 v1@-157.7,-466
PC2: J1.52 U1.28 | length 969.8
  Top Layer w10: U1.28 -187.01,-481.07 -177.7,-490.38 v1(-177.7,-493)
  Bottom Layer w10: J1.52 -654.72,-859.72 -422.4,-627.4 -422.4,-570.26 -345.14,-493 v1(-177.7,-493)
PC3: J1.53 U1.29 | length 978.6
  Top Layer w10: U1.29 -206.69,-508.39 -197.7,-517.38 v1(-197.7,-520)
  Bottom Layer w10: J1.53 -658.5,-891.22 -402.8,-635.52 -402.8,-578.38 -344.42,-520 v1(-197.7,-520)
PC4: J1.23 U1.44 | length 486.7
  Top Layer w10: v1(-826,-418.47) -824.15,-420.33 -814.67,-420.33 -786.69,-448.31 U1.44
  Bottom Layer w10: J1.23 v1@-826.31,-418.78
PC5: J1.22 U1.45 | length 481.8
  Top Layer w10: v1(-826,-449.97) -824.15,-451.82 -813.18,-451.82 -797.01,-467.99 U1.45
  Bottom Layer w10: J1.22 v1@-826.31,-450.28
PC6: J2.20 U1.96 | length 1021.2
  Top Layer w10: v1(99,-762) 99,-764.62 108.27,-773.89 U1.96
  Bottom Layer w10: v1(99,-762) 293.47,-762 542.2,-513.27 J2.20
PC7: J2.21 U1.97 | length 1030.5
  Top Layer w10: v1(119,-735) 119,-737.62 127.95,-746.57 U1.97 127.95,-1070.87 U1.97@128,-1070.82
  Bottom Layer w10: v1(119,-735) 292.75,-735 545.98,-481.77 J2.21
PC8: J2.22 U1.98 | length 1039.2
  Top Layer w10: v1(139,-708) 139,-710.62 147.64,-719.26 U1.98 147.64,-1070.87 U1.98@147.68,-1070.82
  Bottom Layer w10: v1(139,-708) 292.03,-708 549.75,-450.28 J2.22
PC9: J2.23 U1.99 | length 1049.4
  Top Layer w10: v1(158,-680) 158,-682.62 167.32,-691.94 U1.99
  Bottom Layer w10: v1(158,-680) 292.31,-680 553.53,-418.78 J2.23
PC10: J2.58 U1.111 | length 511.2
  Top Layer w10: U1.111 718.56,-960.12 807.44,-1049.01 v1(826,-1049.01)
  Bottom Layer w10: v1@826.31,-1048.7 J2.58
PC11: J2.57 U1.112 | length 506.3
  Top Layer w10: U1.112 415.44,-940.52 726.67,-940.52 801.81,-1015.66 824.15,-1015.66 v1(826,-1017.51)
  Bottom Layer w10: v1@826.31,-1017.2 J2.57
PC12: J2.56 U1.113 | length 504
  Top Layer w10: U1.113 734.62,-920.75 799.89,-986.02 v1(826,-986.02) v1@824.15,-984.16
  Bottom Layer w10: v1@826.31,-985.71 J2.56
PC13: J1.36 U1.7 | length 1197.7
  Top Layer w10: U1.7@226.38,-240.16 226.38,-290.3 v1@234.89,-298.81
  Bottom Layer w10: J1.36 -651.42,-355.79 -414.75,-119.11 94.83,-119.11 226.38,-250.67 226.38,-290.3 v1@234.89,-298.81
  other v1: 234.89,-301
PC14: J1.37 U1.8 | length 1231.5
  Top Layer w10: U1.8 206.69,-317.18 215.89,-326.38 v1(215.89,-329)
  Bottom Layer w10: J1.37 -655.2,-387.28 -406.63,-138.72 86.59,-138.72 206.69,-258.82 206.69,-317.18 215.89,-326.38 v1(215.89,-329)
PC15: J1.38 U1.9 | length 1257.6
  Top Layer w10: U1.9 187.01,-344.5 195.89,-353.38 v1(195.89,-356)
  Bottom Layer w10: J1.38 -658.98,-418.78 -398.51,-158.32 78.35,-158.32 187.01,-266.98 ; 187.01,-266.97 187.01,-344.5 195.89,-353.38 v1(195.89,-356)
PD0: J2.55 U1.114 | length 499.1
  Top Layer w10: U1.114 743.06,-901.06 796.52,-954.52 v1(826,-954.52) v1@824.15,-952.67
  Bottom Layer w10: v1@826.31,-954.21 J2.55
PD1: J2.54 U1.115 | length 494.2
  Top Layer w10: U1.115 751.38,-881.38 793.02,-923.02 v1(826,-923.02) v1@824.15,-921.17
  Bottom Layer w10: v1@826.31,-922.72 J2.54
PD2: J2.53 U1.116 | length 489.3
  Top Layer w10: U1.116 415.44,-861.78 759.5,-861.78 789.25,-891.53 v1(826,-891.53) v1@824.15,-889.67
  Bottom Layer w10: v1@826.31,-891.22 J2.53
PD3: J2.52 U1.117 | length 481.8
  Top Layer w10: U1.117 445.55,-842.01 445.72,-842.18 767.62,-842.18 785.47,-860.03 v1(826,-860.03)
  Bottom Layer w10: v1@826.31,-859.72 J2.52
PD4: J2.51 U1.118 | length 476.9
  Top Layer w10: U1.118 817.17,-822.32 823.38,-828.54 v1(826,-828.54)
  Bottom Layer w10: v1@826.31,-828.23 J2.51
PD5: J2.50 U1.119 | length 476.7
  Top Layer w10: U1.119 817.78,-802.64 823.38,-797.04 v1(826,-797.04)
  Bottom Layer w10: v1@826.31,-796.73 J2.50
PD6: J2.49 U1.122 | length 483.4
  Top Layer w10: U1.122 792.58,-743.58 812.71,-763.71 824.16,-763.71 v1(826,-765.54)
  Bottom Layer w10: v1@826.31,-765.24 J2.49
PD7: J2.48 U1.123 | length 478.5
  Top Layer w10: U1.123 415.44,-723.98 800.7,-723.98 810.77,-734.05 v1(826,-734.05)
  Bottom Layer w10: v1@826.31,-733.74 J2.48
PD8: J2.5 U1.77 | length 1387.5
  Top Layer w10: v1(-275,-899) -275,-901.62 -265.75,-910.87 U1.77
  Bottom Layer w10: v1(-275,-899) -275,-901.62 -265.75,-910.87 -265.75,-1035.45 -168.3,-1132.9 339.3,-1132.9 486.49,-985.71 J2.5
PD9: J2.6 U1.78 | length 1413.5
  Top Layer w10: v1(-255,-872) -255,-874.62 -246.06,-883.56 U1.78
  Bottom Layer w10: v1(-255,-872) -255,-874.62 -246.06,-883.56 -246.06,-1027.29 -160.15,-1113.21 331.15,-1113.21 490.14,-954.21 J2.6
PD10: J2.7 U1.79 | length 1439.5
  Top Layer w10: v1(-235,-845) -235,-847.62 -226.38,-856.24 U1.79
  Bottom Layer w10: v1(-235,-845) -235,-847.62 -226.38,-856.24 -226.38,-1019.14 -151.99,-1093.52 322.99,-1093.52 493.8,-922.72 J2.7
PD11: J2.8 U1.80 | length 1468.4
  Top Layer w10: v1(-216,-817) -216,-819.62 -206.69,-828.93 U1.80
  Bottom Layer w10: v1(-216,-817) -216,-819.62 -206.69,-828.93 -206.69,-1010.98 -143.84,-1073.84 314.84,-1073.84 497.46,-891.22 J2.8
PD12: J2.9 U1.81 | length 1494.4
  Top Layer w10: v1(-196,-790) -196,-792.62 -187.01,-801.61 U1.81
  Bottom Layer w10: v1(-196,-790) -196,-792.62 -187.01,-801.61 -187.01,-1002.83 -135.68,-1054.15 306.68,-1054.15 501.11,-859.72 J2.9
PD13: J2.10 U1.82 | length 1523.2
  Top Layer w10: v1(-177,-762) -177,-764.62 -167.32,-774.3 U1.82
  Bottom Layer w10: v1(-177,-762) -177,-764.62 -167.32,-774.3 -167.32,-994.68 -127.53,-1034.47 298.53,-1034.47 504.77,-828.23 J2.10
PD14: J2.11 U1.85 | length 972.1
  Top Layer w10: v1@-116.78,-1011.7 -108.27,-1020.21 U1.85
  Bottom Layer w10: v1(-116.78,-1009.51) 295.42,-1009.51 508.2,-796.73 J2.11
PD15: J2.12 U1.86 | length 985.5
  Top Layer w10: v1(-97.78,-981.51) -97.78,-984.13 -88.58,-993.33 U1.86 U1.86@-88.58,-1070.87
  Bottom Layer w10: v1(-97.78,-981.51) 295.7,-981.51 511.98,-765.24 J2.12
PE0: J2.33 U1.141 | length 519.1
  Top Layer w10: U1.141 415.44,-369.48 652.24,-369.48 755.27,-266.45 818.54,-266.45 823.38,-261.61 v1(826,-261.61)
  Bottom Layer w10: v1@826.31,-261.3 J2.33
PE1: J2.32 U1.142 | length 523.9
  Top Layer w10: U1.142 644.12,-349.88 762.04,-231.96 824.15,-231.96 v1(826,-230.11)
  Bottom Layer w10: v1@826.31,-229.8 J2.32
PE2: J1.31 U1.1 | length 1378.1
  Top Layer w10: U1.1@344.49,-240.16 344.49,-290.3 353,-298.81 v1(353,-301) ; U1.1 U1.1@344.49,-210.12
  Bottom Layer w10: J1.31 -632.53,-198.31 -455.34,-21.11 136.11,-21.11 344.49,-229.49 344.49,-290.3 353,-298.81 v1(353,-301)
PE3: J1.32 U1.2 | length 1378
  Top Layer w10: U1.2 324.8,-317.18 334,-326.38 v1(334,-329)
  Bottom Layer w10: J1.32 -636.31,-229.8 -447.22,-40.72 127.88,-40.72 324.8,-237.64 324.8,-317.18 334,-326.38 v1(334,-329)
PE4: J1.33 U1.3 | length 1404.1
  Top Layer w10: U1.3 305.12,-344.5 314,-353.38 v1(314,-356)
  Bottom Layer w10: J1.33 -640.09,-261.3 -439.1,-60.32 119.64,-60.32 305.12,-245.8 305.12,-344.5 314,-353.38 v1(314,-356)
PE5: J1.34 U1.4 | length 1430.2
  Top Layer w10: U1.4 285.43,-371.81 294,-380.38 v1(294,-383)
  Bottom Layer w10: J1.34 -643.87,-292.8 -430.99,-79.92 111.4,-79.92 285.43,-253.95 285.43,-371.81 294,-380.38 v1(294,-383)
PE6: J1.35 U1.5 | length 1459.1
  Top Layer w10: U1.5 265.75,-399.13 275,-408.38 v1(275,-411)
  Bottom Layer w10: J1.35 -647.64,-324.29 -422.87,-99.51 103.16,-99.51 265.75,-262.1 265.75,-399.13 275,-408.38 v1(275,-411)
PE7: J1.11 U1.58 | length 504.4
  Top Layer w10: v1(-826,-796.43) -736.86,-796.43 -664.5,-724.07 -445.72,-724.07 -445.55,-723.9 U1.58
  Bottom Layer w10: J1.11 v1@-826.31,-796.73
PE8: J1.10 U1.59 | length 509.3
  Top Layer w10: v1(-826,-827.92) -740.64,-827.92 -656.39,-743.67 -415.44,-743.67 U1.59
  Bottom Layer w10: J1.10 v1@-826.31,-828.23
PE9: J1.9 U1.60 | length 514.2
  Top Layer w10: v1(-826,-859.42) -823.38,-859.42 -813.96,-850 -735,-850 -648.27,-763.27 U1.60
  Bottom Layer w10: J1.9 v1@-826.31,-859.72
PE10: J1.8 U1.63 | length 518.6
  Top Layer w10: v1(-826,-890.91) -824.39,-892.52 -812.48,-892.52 -795,-910 -724.03,-910 -636.44,-822.41 -415.44,-822.41 U1.63
  Bottom Layer w10: J1.8 v1@-826.31,-891.22
PE11: J1.7 U1.64 | length 513.9
  Top Layer w10: v1(-826,-922.41) -823.38,-922.41 -815.79,-930 -716.31,-930 -628.49,-842.18 -445.72,-842.18 -445.55,-842.01 U1.64
  Bottom Layer w10: J1.7 v1@-826.31,-922.72
PE12: J1.6 U1.65 | length 512.5
  Top Layer w10: v1(-826,-953.91) -712.5,-953.91 -620.37,-861.78 -415.44,-861.78 U1.65
  Bottom Layer w10: J1.6 v1@-826.31,-954.21
PE13: J1.5 U1.66 | length 517.4
  Top Layer w10: v1(-826,-985.4) -716.28,-985.4 -612.42,-881.55 -445.72,-881.55 -445.55,-881.38 U1.66
  Bottom Layer w10: J1.5 v1@-826.31,-985.71
PE14: J1.4 U1.67 | length 522.3
  Top Layer w10: v1(-826,-1016.9) -720.05,-1016.9 -604.3,-901.15 U1.67 U1.67
  Bottom Layer w10: J1.4 v1@-826.31,-1017.2
PE15: J1.3 U1.68 | length 527.2
  Top Layer w10: v1(-826,-1048.39) -723.83,-1048.39 -596.36,-920.92 -445.72,-920.92 -445.55,-920.75 U1.68
  Bottom Layer w10: J1.3 v1@-826.31,-1048.7
PF0: J1.39 U1.10 | length 1283.7
  Top Layer w10: U1.10 167.32,-371.81 175.89,-380.38 v1(175.89,-383)
  Bottom Layer w10: J1.39 -662.75,-450.28 -390.39,-177.92 70.11,-177.92 167.32,-275.13 167.32,-371.81 175.89,-380.38 v1(175.89,-383)
PF1: J1.40 U1.11 | length 1312.6
  Top Layer w10: U1.11 147.64,-399.13 156.89,-408.38 v1(156.89,-411)
  Bottom Layer w10: J1.40 -704.06,-480.87 -665.63,-480.87 -382.27,-197.51 61.87,-197.51 147.64,-283.28 147.64,-399.13 156.89,-408.38 v1(156.89,-411)
PF2: J1.41 U1.12 | length 1338.5
  Top Layer w10: U1.12 127.95,-426.44 136.89,-435.38 v1(136.89,-438)
  Bottom Layer w10: J1.41 -704.06,-512.36 -669.4,-512.36 -374.16,-217.11 53.39,-217.11 127.95,-291.68 127.95,-426.44 136.89,-435.38 v1(136.89,-438)
PF3: J1.42 U1.13 | length 1393.4
  Top Layer w10: U1.13 108.27,-453.76 116.89,-462.38 v1(116.89,-465)
  Bottom Layer w10: J1.42 -704.06,-543.86 -624.26,-543.86 -618.4,-538 -618.4,-489.08 -366.04,-236.72 45.27,-236.72 108.27,-299.71 108.27,-453.76 116.89,-462.38 v1(116.89,-465)
PF4: J1.43 U1.14 | length 1425.8
  Top Layer w10: U1.14 88.58,-481.07 97.89,-490.38 v1(97.89,-493)
  Bottom Layer w10: J1.43 -704.06,-575.35 -622.23,-575.35 -598.8,-551.93 -598.8,-497.2 -358,-256.4 -303.27,-256.4 -303.19,-256.32 37.15,-256.32 88.58,-307.74 88.58,-481.07 97.89,-490.38 v1(97.89,-493)
PF5: J1.44 U1.15 | length 1451.8
  Top Layer w10: U1.15 68.9,-508.39 77.89,-517.38 v1(77.89,-520)
  Bottom Layer w10: J1.44 -626.91,-607.76 -579.2,-560.04 -579.2,-505.31 -349.89,-276 29,-276 68.9,-315.9 68.9,-508.39 77.89,-517.38 v1(77.89,-520)
PF6: J1.45 U1.18 | length 960.4
  Top Layer w10: U1.18@9.84,-240.16 9.84,-290.3 18.35,-298.81 v1(18.35,-301)
  Bottom Layer w10: J1.45 -630.69,-639.25 -559.6,-568.16 -559.6,-513.43 -348.17,-302 v1@19.35,-302
PF7: J1.46 U1.19 | length 971.1
  Top Layer w10: U1.19 -9.84,-317.18 -0.65,-326.38 v1(-0.65,-329)
  Bottom Layer w10: J1.46 -634.47,-670.75 -540,-576.28 -540,-521.55 -347.45,-329 v1(-0.65,-329)
PF8: J1.47 U1.20 | length 980.4
  Top Layer w10: U1.20 -29.53,-344.5 -20.65,-353.38 v1(-20.65,-356)
  Bottom Layer w10: J1.47 -638.24,-702.24 -520.4,-584.4 -520.4,-529.67 -347.73,-357 v1@-19.65,-357
PF9: J1.48 U1.21 | length 989.1
  Top Layer w10: U1.21 -49.21,-371.81 -40.65,-380.38 v1(-40.65,-383)
  Bottom Layer w10: J1.48 -642.02,-733.74 -500.8,-592.52 -500.8,-537.79 -347.01,-384 v1@-39.65,-384
PF10: J1.49 U1.22 | length 1000.2
  Top Layer w10: U1.22 -68.9,-399.13 -59.65,-408.38 v1(-59.65,-411)
  Bottom Layer w10: J1.49 -644.24,-765.24 -481.2,-602.2 -481.2,-545.91 -346.29,-411 v1(-59.65,-411)
PF11: J1.18 U1.49 | length 486.4
  Top Layer w10: v1(-826,-575.95) -824.15,-574.1 -814.1,-574.1 -786.73,-546.73 U1.49
  Bottom Layer w10: J1.18 v1@-826.31,-576.26
PF12: J1.17 U1.50 | length 491.3
  Top Layer w10: v1(-826,-607.45) -824.15,-605.6 -815.6,-605.6 -776.42,-566.42 U1.50
  Bottom Layer w10: J1.17 v1@-826.31,-607.76
PF13: J1.16 U1.53 | length 489
  Top Layer w10: v1(-826,-638.95) -824.15,-640.8 -814.2,-640.8 -805,-650 -729.03,-650 -704.59,-625.56 U1.53@-415.44,-625.56
  Bottom Layer w10: J1.16 v1@-826.31,-639.25
PF14: J1.15 U1.54 | length 484.8
  Top Layer w10: v1(-826,-670.44) -721.75,-670.44 -696.64,-645.33 -445.72,-645.33 -445.55,-645.16 U1.54
  Bottom Layer w10: J1.15 v1@-826.31,-670.75
PF15: J1.14 U1.55 | length 489.7
  Top Layer w10: v1(-826,-701.94) -725.53,-701.94 -688.52,-664.93 -415.44,-664.93 U1.55
  Bottom Layer w10: J1.14 v1@-826.31,-702.24
PG0: J1.13 U1.56 | length 494.6
  Top Layer w10: v1(-826,-733.43) -729.31,-733.43 -680.57,-684.7 -445.72,-684.7 -445.55,-684.53 U1.56
  Bottom Layer w10: J1.13 v1@-826.31,-733.74
PG1: J1.12 U1.57 | length 499.5
  Top Layer w10: v1(-826,-764.93) -824.15,-763.08 -731.23,-763.08 -672.45,-704.3 -415.44,-704.3 U1.57
  Bottom Layer w10: J1.12 v1@-826.31,-765.24
PG2: J2.13 U1.87 | length 994.2
  Top Layer w10: v1(-77.78,-954.51) -77.78,-957.13 -68.9,-966.01 U1.87@-68.9,-1070.87
  Bottom Layer w10: v1(-77.78,-954.51) 294.98,-954.51 515.75,-733.74 J2.13
PG3: J2.14 U1.88 | length 1003
  Top Layer w10: v1(-57.78,-927.51) -57.78,-930.13 -49.21,-938.7 U1.88 U1.88@-49.21,-1070.87
  Bottom Layer w10: v1(-57.78,-927.51) 294.26,-927.51 519.53,-702.24 J2.14
PG4: J2.15 U1.89 | length 1013.7
  Top Layer w10: v1(-38.78,-899.51) -38.78,-902.13 -29.53,-911.38 U1.89 U1.89@-29.53,-1070.87
  Bottom Layer w10: v1(-38.78,-899.51) 294.55,-899.51 523.31,-670.75 J2.15
PG5: J2.16 U1.90 | length 1022.4
  Top Layer w10: v1(-18.78,-872.51) -18.78,-875.13 -9.84,-884.07 U1.90@-9.84,-1070.87
  Bottom Layer w10: v1(-18.78,-872.51) 293.83,-872.51 527.09,-639.25 J2.16
PG6: J2.17 U1.91 | length 1031.1
  Top Layer w10: v1(1.22,-845.51) 1.22,-848.13 9.84,-856.75 U1.91 U1.91@9.84,-1070.87
  Bottom Layer w10: v1(1.22,-845.51) 293.11,-845.51 530.86,-607.76 J2.17
PG7: J2.18 U1.92 | length 1041.9
  Top Layer w10: v1(20.22,-817.51) 20.22,-820.13 29.53,-829.44 U1.92@29.53,-1070.87
  Bottom Layer w10: v1(20.22,-817.51) 293.39,-817.51 534.64,-576.26 J2.18
PG8: J2.19 U1.93 | length 1050.8
  Top Layer w10: v1(40.22,-790.51) 40.22,-793.13 49.21,-802.12 U1.93 U1.93@49.21,-1070.87
  Bottom Layer w10: v1(40.22,-790.51) 292.67,-790.51 538.61,-544.57 704.77,-544.57 J2.19
PG9: J2.47 U1.124 | length 475
  Top Layer w10: U1.124 415.7,-703.87 824.68,-703.87 v1(826,-702.55)
  Bottom Layer w10: v1@826.31,-702.24 J2.47
PG10: J2.46 U1.125 | length 479.9
  Top Layer w10: U1.125 808.89,-684.53 820.51,-672.91 824.15,-672.91 v1(826,-671.06)
  Bottom Layer w10: v1@826.31,-670.75 J2.46
PG11: J2.45 U1.126 | length 484.8
  Top Layer w10: U1.126 792.16,-664.84 815.59,-641.41 824.15,-641.41 v1(826,-639.56)
  Bottom Layer w10: v1@826.31,-639.25 J2.45
PG12: J2.44 U1.127 | length 489.7
  Top Layer w10: U1.127 780.84,-645.16 816.08,-609.92 824.15,-609.92 v1(826,-608.06)
  Bottom Layer w10: v1@826.31,-607.76 J2.44
PG13: J2.43 U1.128 | length 494.6
  Top Layer w10: U1.128 768.53,-625.47 815.58,-578.42 824.15,-578.42 v1(826,-576.57)
  Bottom Layer w10: v1@826.31,-576.26 J2.43
PG14: J2.42 U1.129 | length 499.5
  Top Layer w10: U1.129 757.21,-605.79 816.08,-546.92 824.15,-546.92 v1(826,-545.07)
  Bottom Layer w10: v1@826.31,-544.76 J2.42
PG15: J2.41 U1.132 | length 488.1
  Top Layer w10: U1.132 415.44,-546.65 696.82,-546.65 729.89,-513.57 v1(826,-513.57)
  Bottom Layer w10: v1@826.31,-513.27 J2.41
VBUS: C4.2 C5.2 C23.2 C24.2 D4.2 IC1.3 J1.59 J1.60 TP1.1 | length 1281.6
  Top Layer w18: v2(-725,-1165) -725,-1210 -799,-1284 -799,-1340.12 C4.2 -799,-1352.12 -799,-1414 C5.2 -799,-1426 -799,-1461 -781.75,-1478.25 IC1.3 -693.26,-1490.86 -664.14,-1490.86 -656.29,-1498.71 -351.29,-1498.71 C24.2 -338.71,-1498.71 -276.29,-1498.71 C23.2 -263.71,-1498.71 -191,-1498.71 TP1.1 ; D4.2@-160,-1354.61 D4.2
  Top Layer w20: TP1.1 D4.2@-160,-1354.61
  Bottom Layer w10: J1.59@-726,-1081.1 -725.09,-1080.2 J1.59 ; J1.60@-725,-1111.69 J1.60
  Bottom Layer w18: v2(-725,-1165) -725,-1111.69 J1.59@-725,-1084
VCC_3V3: C6.2 C7.2 C8.2 C9.2 C10.2 C11.2 C12.2 C13.2 C14.2 C15.2 C16.2 C17.2 C18.2 C19.2 C20.2 C21.2 C22.2 IC1.2 J1.57 J1.58 P1.4 R2.1 R3.2 TP2.1 U1.6 U1.17 U1.30 U1.32 U1.33 U1.39 U1.52 U1.62 U1.72 U1.84 U1.95 U1.108 U1.121 U1.131 U1.144 | length 8194
  Top Layer w6: U1.52 -370.21,-605.79 -363,-613 -363,-704 -321,-746 -321,-766 ; U1.39 -368.05,-349.88 -364.53,-346.37 -364.53,-190.53 -354,-180 -285.43,-180 ; U1.62@-415.01,-802.98 -372.02,-802.98 -365,-810 ; U1.72@-384.99,-999.14 -375.45,-999.14 -365,-988.7 -365,-810 ; U1.32 -265.75,-710.75 ; U1.121 364.27,-763.27 321,-720 321,-529 266.79,-474.79 266.79,-456.89 248.89,-439 ; U1.131 367.51,-566.42 364,-562.9 364,-485 v1(324.93,-445.93) 321.51,-445.93 314.58,-439 248.89,-439 ; U1.144 427.32,-310.51 430,-307.83 v1(430,-270) ; -365,-810 -321,-766 ; -321,-766 -265.75,-710.75 ; -265.75,-710.75 -42.75,-710.75 229,-439 248.89,-439
  Top Layer w10: C17.2@-513.74,-792.85 -503.95,-802.64 U1.62 U1.62@-415.01,-802.98 ; C16.2 -503.95,-605.79 U1.52 ; C22.2@-513.74,-340.09 -503.95,-349.88 U1.39 ; v2(-475,-1145) -509.51,-1110.49 -509.51,-1013.5 C18.2 -503.95,-999.49 -385.34,-999.49 U1.72@-384.99,-999.14 ; R3.2@-354.78,-1288 -420,-1288 -457.5,-1250.5 -325.5,-1250.5 -243.74,-1168.74 C19.2 ; C8.2 -285.43,-141.26 C9.2@-280.54,-146.15 ; U1.33 -285.43,-180 -285.43,-151.05 C9.2@-280.54,-146.15 ; U1.32 -265.75,-151.05 C9.2@-275.54,-141.26 ; C11.2 C9.2@-275.54,-141.26 ; U1.30 C11.2@-226.38,-141.26 ; U1.84 C19.2 ; TP2.1 v1(-70,-1420) ; v1(-70,-1250) -70.55,-1249.45 -70.55,-1168.74 ; U1.17 C10.2 C12.2 ; U1.95 C20.2 -70.55,-1168.74 ; U1.6 C12.2 ; U1.108 344.49,-1089.16 345.32,-1090 508.9,-1090 C21.2@508.9,-1094.17 ; U1.144@390,-309.68 390.84,-310.51 U1.144 ; v1(390,-60) R2.1 381.52,-67.38 362.62,-67.38 288.74,-141.26 C12.2 ; U1.121 503.95,-763.27 C15.2@513.74,-773.06 ; U1.131 503.95,-566.42 C14.2@513.74,-576.2 ; U1.144@427.32,-310.51 503.95,-310.51 C13.2 ; C21.2 513.74,-1136.83 P1.4 ; C9.2@-280.54,-146.15 C9.2 C9.2@-275.54,-141.26 ; C19.2 -70.55,-1168.74
  Top Layer w15: C7.2 -468,-1211.09 -468,-1240 -457.5,-1250.5 ; R3.2@-351.78,-1291 R3.2
  Top Layer w20: IC1.2 -695.17,-1376.99 -661.99,-1376.99 -554.65,-1269.65 -554.65,-1208.73 C6.2 C7.2 ; C7.2@-475,-1201.88 v2(-475,-1145)
  Bottom Layer w6: v1(324.93,-445.93) 324.93,-402.07 338,-389 356,-389 430,-315 v1(430,-270) 430,-100 v1(390,-60)
  Bottom Layer w10: J1.58 -571.3,-1048.7 -602.8,-1017.2 J1.57 ; v1(-70,-1420) -70,-1335 ; v1(-70,-1250) -70,-1335 ; P1.4 421.91,-1335 -70,-1335
  Bottom Layer w20: -571.3,-1048.7 v2(-475,-1145)
pads on no net: IC1.4 P2.4

## Polygon pours and split planes (outlines as drawn)
GND on Bottom Layer "NONET_L01_P-001" (solid, remove dead copper, pour order 7): 940,-1407.2 cw(c802.21,-1407.21) 802.2,-1545 -802.2,-1545 cw(c-802.21,-1407.21) -940,-1407.2 -940,-137.8 cw(c-802.2,-137.8) -802.2,0 802.2,0 cw(c802.21,-137.79) 940,-137.8 940,-1084
GND on Top Layer "NONET_L01_P-001" (solid, remove dead copper, pour order 3): 940,-1407.2 cw(c802.21,-1407.21) 802.2,-1545 -802.2,-1545 cw(c-802.21,-1407.21) -940,-1407.2 -940,-137.8 cw(c-802.2,-137.8) -802.2,0 802.2,0 cw(c802.21,-137.79) 940,-137.8 940,-1084

## Silkscreen, mask and mechanical layers (free items; w line width, h text height)
Top Overlay:
  lines w10: -225,-1545 -225,-1430 75,-1430 75,-1545 ; 516.91,-1540 516.91,-1140 725,-1140 725,-1335
  lines w15: -940,-1407.2 ccw(c-802.2,-1407.2) -802.2,-1545 120,-1545 802.2,-1545 ccw(c802.2,-1407.2) 940,-1407.2 940,-137.8 ccw(c802.2,-137.8) 802.2,0 -802.2,0 ccw(c-802.2,-137.8) -940,-137.8 -940,-880 -940,-1407.2
  text "BUTTON1" at 742.69,-138 h26
  text "Based on STM32F407ZET6 | by Power Lin" at -896,-144.17 h30 r270
  text "RST" at -719.99,-150 h30
  text "RobotCtrl_V2_Core-board" at 867.34,-225.81 h40 r270
  text "V2.3" at -349.98,-1193 h28
  text "3V3" at 630.01,-1205 h30
  text "BETA" at -348.65,-1237 h26
  text "PWR/Slave" at 465,-1274 h30 r270
  text "DIO" at 630.01,-1300 h30
  text "LED1" at 806.68,-1308 h26
  text "CLK" at 630.01,-1405 h30
  text "GND" at 630.01,-1505 h30
  text "GND" at -209.99,-1530 h30
  text "3V3" at -109.99,-1530 h30
  text "5V" at 5.01,-1530 h30
Bottom Overlay:
  lines w15: -940,-1407.2 ccw(c-802.2,-1407.2) -802.2,-1545 120,-1545 802.2,-1545 ccw(c802.2,-1407.2) 940,-1407.2 940,-137.8 ccw(c802.2,-137.8) 802.2,0 -802.2,0 ccw(c-802.2,-137.8) -940,-137.8 -940,-880 -940,-1407.2
Mechanical 1:
  lines w10: -940,-1407.2 ccw(c-802.2,-1407.2) -802.2,-1545 120,-1545 802.2,-1545 ccw(c802.2,-1407.2) 940,-1407.2 940,-137.8 ccw(c802.2,-137.8) 802.2,0 -802.2,0 ccw(c-802.2,-137.8) -940,-137.8 -940,-880 -940,-1407.2